# Altium PCB Motor Control.PcbDoc
Units mil, origin at the board's own origin, x right, y up, seen from the top; angles counter-clockwise.
Board outline 5000 x 2300 mil, 2 copper layers (Top Layer, Bottom Layer); 27 components, 75 nets, 236 pads, 0 vias.
Unrouted connection lines stored in the file: 130.
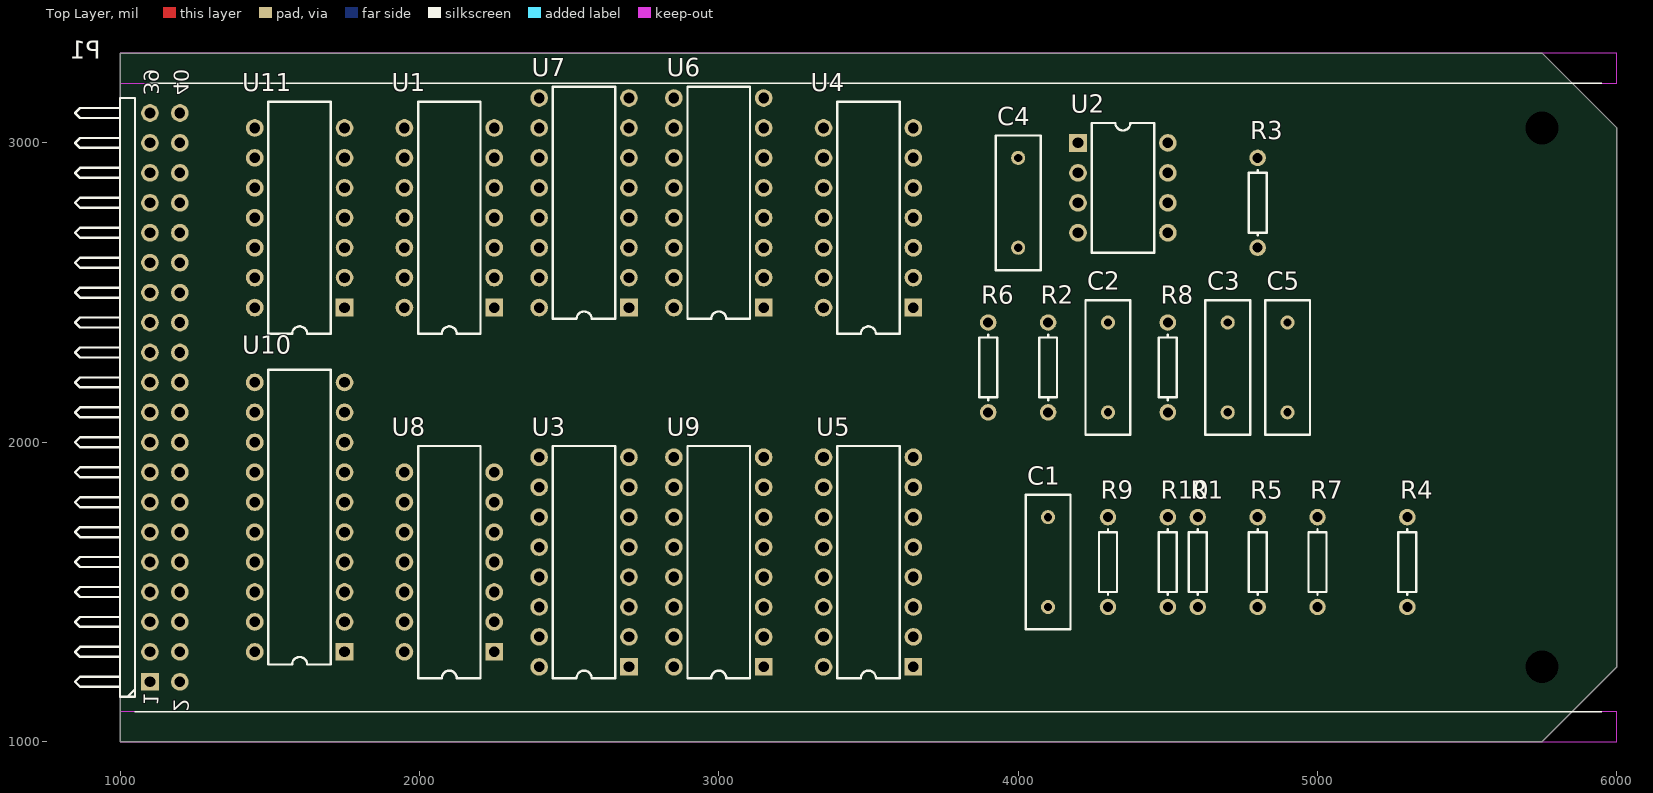
[diagram p0: Top Layer view]
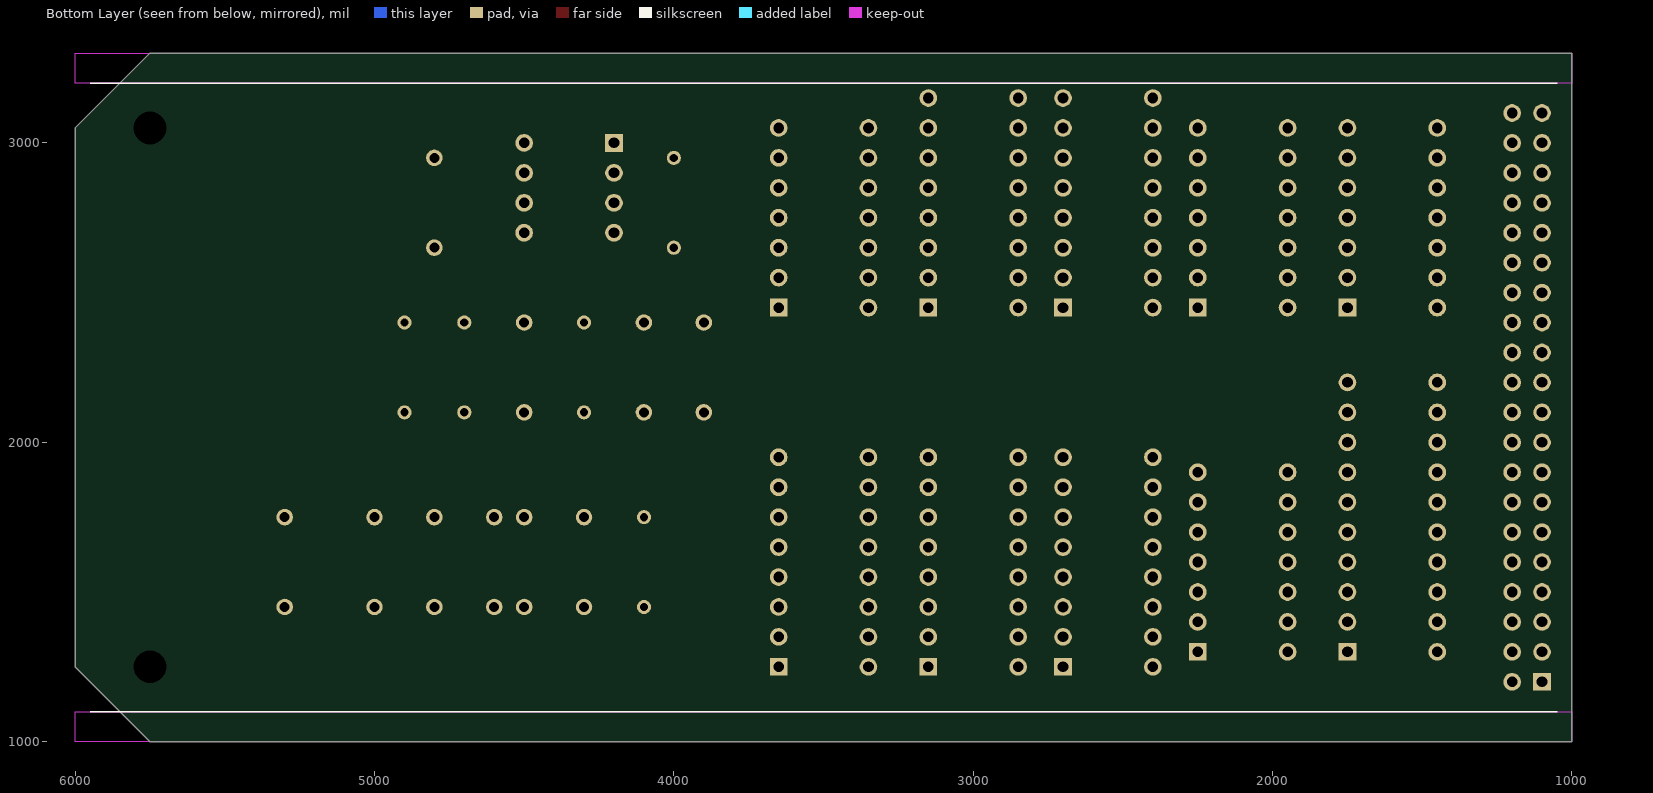
[diagram p1: Bottom Layer view, seen from below]

## Layer stack, top to bottom
Top Solder: solder mask 0.4, Solder Resist, Dk 3.5
Top Layer: signal copper 1.4
Dielectric 1: dielectric 12.6, FR-4, Dk 4.8
Bottom Layer: signal copper 1.4
Bottom Solder: solder mask 0.4, Solder Resist, Dk 3.5

## Board outline
6000,1250 5750,1000 1000,1000 1000,3300 5750,3300 6000,3050

## Design rules (kind name [scope] priority, off if disabled: settings)
Clearance [All] p1: gap=10 ignorepadtopadclearanceinfootprint=FALSE except(0: Arc-Hole Track-Hole SMDPad-Hole THPad-Hole Via-Hole Fill-Hole Poly-Hole Region-Hole Text-Hole)
PolygonConnect [All] p1: connectstyle=Relief reliefconductorwidth=10 reliefentries=4 polygonreliefangle="90 Angle" airgapwidth=10
RoutingVias [All] p1: holewidth=28 width=50 viastyle="Through Hole" minholewidth=28 minwidth=50 maxholewidth=28 maxwidth=50
SolderMaskExpansion [All] p1: expansion=4 istentingtop=FALSE
Width [All] p1: maxlimit=10 minlimit=10 preferedwidth=10
30 further rules are at their usual default settings.

## Classes and differential pairs
net class CNT_[7..0]: CNT_0 CNT_1 CNT_2 CNT_3 CNT_4 CNT_5 CNT_6 CNT_7
component class ZF: U8 U11
component class Register: P1 U9 U10
net class N000-1_[8..0]: BUS_0 BUS_1 BUS_2 BUS_3 BUS_4 BUS_5 BUS_6 BUS_7 BUS_[15..0]
component class Encoder: C1 C2 C3 C4 C5 R1 R2 R3 R4 R5 R6 R7 R8 R9 R10 U1 U2 U3 U4 U5 U6 U7

## Components (designator, comment, footprint, x,y, rotation, side; value= is the part's Value field where it differs from the comment)
C1 "Cap" RAD-0.3 4100,1600 r90 top value=100nF
C2 "Cap" RAD-0.3 4300,2250 r270 top value=100nF
C3 "Cap" RAD-0.3 4700,2250 r270 top value=100nF
C4 "Cap" RAD-0.3 4000,2800 r270 top value=100pF
C5 "Cap" RAD-0.3 4900,2250 r90 top value=100pF
P1 "Header 20X2H" HDR2X20H 1100,1200 r90 top
R1 "Res1" AXIAL-0.3 4600,1600 r90 top value=100
R2 "Res1" AXIAL-0.3 4100,2250 r270 top value=100
R3 "Res1" AXIAL-0.3 4800,2800 r270 top value=10k
R4 "Res1" AXIAL-0.3 5300,1600 r90 top value=10k
R5 "Res1" AXIAL-0.3 4800,1600 r90 top value=10k
R6 "Res1" AXIAL-0.3 3900,2250 r90 top value=10k
R7 "Res1" AXIAL-0.3 5000,1600 r90 top value=25k
R8 "Res1" AXIAL-0.3 4500,2250 r270 top value=25k
R9 "Res1" AXIAL-0.3 4300,1600 r90 top value=1k
R10 "Res1" AXIAL-0.3 4500,1600 r90 top value=1k
U1 "SN74LS04N" N014 2100,2750 r90 top
U2 "LM393P" P008 4350,2850 r270 top
U3 "SN74LS174N" N016 2550,1600 r90 top
U4 "SN74LS86AN" N014 3500,2750 r90 top
U5 "SN74LS169BN" N016 3500,1600 r90 top
U6 "SN74LS169BN" N016 3000,2800 r90 top
U7 "SN74LS169BN" N016 2550,2800 r90 top
U8 "SN74LS32N" N014 2100,1600 r90 top
U9 "SN74LS173AN" N016D 3000,1600 r90 top
U10 "SN74LS245N" N020 1600,1750 r90 top
U11 "SN74LS32N" N014 1600,2750 r90 top

## Footprints (in the part's own frame and the unit in brackets; to place one, negate y for a bottom-side part, rotate by r counter-clockwise, add the part's x,y. Pads: shape width x height; smd on the part's side, far side on the other; paste and mask are expansions set on the pad)
AXIAL-0.3 [mm] "Axial Device, Thru-Hole; 2 Leads; 0.3 in Pin Spacing"
  round 1.4 hole 0.85: 1(-3.81,0) 2(3.81,0)
  silkscreen extent -2.77,-0.76 2.77,0.76
HDR2X20H [mm] "Connector; Header; 20x2 Position; Right Angle"
  rect 1.5x1.5 hole 0.9: 1(0,0)
  round 1.5 hole 0.9: 2(0,-2.54) 3(2.54,0) 4(2.54,-2.54) 5(5.08,0) 6(5.08,-2.54) 7(7.62,0) 8(7.62,-2.54) 9(10.16,0) 10(10.16,-2.54) 11(12.7,0) 12(12.7,-2.54) 13(15.24,0) 14(15.24,-2.54) 15(17.78,0) 16(17.78,-2.54) 17(20.32,0) 18(20.32,-2.54) 19(22.86,0) 20(22.86,-2.54) 21(25.4,0) 22(25.4,-2.54) 23(27.94,0) 24(27.94,-2.54) 25(30.48,0) 26(30.48,-2.54) 27(33.02,0) 28(33.02,-2.54) 29(35.56,0) 30(35.56,-2.54) 31(38.1,0) 32(38.1,-2.54) 33(40.64,0) 34(40.64,-2.54) 35(43.18,0) 36(43.18,-2.54) 37(45.72,0) 38(45.72,-2.54) 39(48.26,0) 40(48.26,-2.54)
  silkscreen extent -1.27,1.27 49.53,6.35
N014 [mm] "DIP; 14 Leads; Row Spacing 7.62 mm; Pitch 2.54 mm"
  rect 1.5x1.5 hole 0.9: 1(-7.62,-3.81)
  round 1.5 hole 0.9: 2(-5.08,-3.81) 3(-2.54,-3.81) 4(0,-3.81) 5(2.54,-3.81) 6(5.08,-3.81) 7(7.62,-3.81) 8(7.62,3.81) 9(5.08,3.81) 10(2.54,3.81) 11(0,3.81) 12(-2.54,3.81) 13(-5.08,3.81) 14(-7.62,3.81)
  silkscreen extent -9.85,-2.65 9.85,2.65, body extent -9.15,-5.08 9.15,5.12, height 7.88
N016 [mm] "DIP; 16 Leads; Row Spacing 7.62 mm; Pitch 2.54 mm"
  rect 1.5x1.5 hole 0.9: 1(-8.89,-3.81)
  round 1.5 hole 0.9: 2(-6.35,-3.81) 3(-3.81,-3.81) 4(-1.27,-3.81) 5(1.27,-3.81) 6(3.81,-3.81) 7(6.35,-3.81) 8(8.89,-3.81) 9(8.89,3.81) 10(6.35,3.81) 11(3.81,3.81) 12(1.27,3.81) 13(-1.27,3.81) 14(-3.81,3.81) 15(-6.35,3.81) 16(-8.89,3.81)
  silkscreen extent -9.85,-2.65 9.85,2.65
N016D [mm] "DIP; 16 Leads; Row Spacing 7.62 mm; Pitch 2.54 mm"
  rect 1.5x1.5 hole 0.9: 1(-8.89,-3.81)
  round 1.5 hole 0.9: 2(-6.35,-3.81) 3(-3.81,-3.81) 4(-1.27,-3.81) 5(1.27,-3.81) 6(3.81,-3.81) 7(6.35,-3.81) 8(8.89,-3.81) 9(8.89,3.81) 10(6.35,3.81) 11(3.81,3.81) 12(1.27,3.81) 13(-1.27,3.81) 14(-3.81,3.81) 15(-6.35,3.81) 16(-8.89,3.81)
  silkscreen extent -9.85,-2.65 9.85,2.65
N020 [mm] "DIP; 20 Leads; Row Spacing 7.62 mm; Pitch 2.54 mm"
  rect 1.5x1.5 hole 0.9: 1(-11.43,-3.81)
  round 1.5 hole 0.9: 2(-8.89,-3.81) 3(-6.35,-3.81) 4(-3.81,-3.81) 5(-1.27,-3.81) 6(1.27,-3.81) 7(3.81,-3.81) 8(6.35,-3.81) 9(8.89,-3.81) 10(11.43,-3.81) 11(11.43,3.81) 12(8.89,3.81) 13(6.35,3.81) 14(3.81,3.81) 15(1.27,3.81) 16(-1.27,3.81) 17(-3.81,3.81) 18(-6.35,3.81) 19(-8.89,3.81) 20(-11.43,3.81)
  silkscreen extent -12.5,-2.65 12.5,2.65, body extent -13.08,-5.08 13.08,5.12, height 7.88
P008 [mm] "DIP; 8 Leads; Row Spacing 7.62 mm; Pitch 2.54 mm"
  rect 1.5x1.5 hole 0.9: 1(-3.81,-3.81)
  round 1.5 hole 0.9: 2(-1.27,-3.81) 3(1.27,-3.81) 4(3.81,-3.81) 5(3.81,3.81) 6(1.27,3.81) 7(-1.27,3.81) 8(-3.81,3.81)
  silkscreen extent -5.5,-2.65 5.5,2.65
RAD-0.3 [mm] "Radial Cap, Thru-Hole; 2 Leads; 0.3 in Pin Spacing"
  round 1.2 hole 0.7: 1(-3.81,0) 2(3.81,0)
  silkscreen extent -5.71,-1.91 5.71,1.91

## Part data
C1 C2 C3 C4 C5: "Capacitor", LatestRevisionDate=17-Jul-2002, LatestRevisionNote="Re-released for DXP Platform.", PackageDescription="Radial Cap, Thru-Hole; 2 Leads; 0.3 in Pin Spacing", PackageReference=RAD-0.3, Published=8-Jun-2000, Publisher="Altium Limited"
P1: library part "Header 20x2H", "Header, 20-Pin, Dual row, Right Angle", LatestRevisionDate=17-Jul-2002, LatestRevisionNote="Re-released for DXP Platform.", Publisher="Altium Limited"
R1 R2 R3 R4 R5 R6 R7 R8 R9 R10: "Resistor", LatestRevisionDate=17-Jul-2002, LatestRevisionNote="Re-released for DXP Platform.", PackageDescription="Axial Device, Thru-Hole; 2 Leads; 0.3 in Pin Spacing", PackageReference=AXIAL-0.3, Published=8-Jun-2000, Publisher="Altium Limited"
U1: "Hex Inverter", ComponentLink1Description="Manufacturer Link", ComponentLink1URL=http://www.ti.com/, ComponentLink2Description=Datasheet, ComponentLink2URL=http://www-s.ti.com/sc/ds/sn74ls04.pdf, DatasheetVersion=Mar-1988, LatestRevisionDate=04-Mar-2005, LatestRevisionNote="Stylized 3D Model Added.", PackageDescription="DIP; 14 Leads; Row Spacing 7.62 mm; Pitch 2.54 mm", PackageReference=N014, PackageVersion=Oct-1995, Published=8-Jun-2000, Publisher="Altium Limited"
U2: "Dual Differential Comparator", Code_JEDEC=MO-001-AN, ComponentLink1Description="Manufacturer Link", ComponentLink1URL=http://www.ti.com/, ComponentLink2Description=Datasheet, ComponentLink2URL=http://www-s.ti.com/sc/ds/lm193.pdf, DatasheetVersion=Nov-1988, LatestRevisionDate=04-Mar-2005, LatestRevisionNote="Stylized 3D Model Added.", PackageDescription="DIP; 8 Leads; Row Spacing 7.62 mm; Pitch 2.54 mm", PackageReference=P008, PackageVersion=Jun-1999, Published=15-Apr-2002, Publisher="Altium Limited"
U3: "Hex D-Type Flip-Flop with Clear", Code_JEDEC=MS-001-BB, ComponentLink1Description="Manufacturer Link", ComponentLink1URL=http://www.ti.com/, ComponentLink2Description=Datasheet, ComponentLink2URL=http://www-s.ti.com/sc/ds/sn74175.pdf, DatasheetVersion=Mar-1988, LatestRevisionDate=04-Mar-2005, LatestRevisionNote="Stylized 3D Model Added.", PackageDescription="DIP; 16 Leads; Row Spacing 7.62 mm; Pitch 2.54 mm", PackageReference=N016, PackageVersion=Oct-1995, Published=8-Jun-2000, Publisher="Altium Limited"
U4: "Quadruple 2-Input Exclusive-OR Gate", ComponentLink1Description="Manufacturer Link", ComponentLink1URL=http://www.ti.com/, ComponentLink2Description=Datasheet, ComponentLink2URL=http://www-s.ti.com/sc/ds/sn74ls86a.pdf, DatasheetVersion=Mar-1988, LatestRevisionDate=04-Mar-2005, LatestRevisionNote="Stylized 3D Model Added.", PackageDescription="DIP; 14 Leads; Row Spacing 7.62 mm; Pitch 2.54 mm", PackageReference=N014, PackageVersion=Oct-1995, Published=8-Jun-2000, Publisher="Altium Limited"
U5 U6 U7: "Synchronous 4-Bit Up/Down Binary Counter", Code_JEDEC=MS-001-BB, ComponentLink1Description="Manufacturer Link", ComponentLink1URL=http://www.ti.com/, ComponentLink2Description=Datasheet, ComponentLink2URL=http://www-s.ti.com/sc/ds/sn74ls169b.pdf, DatasheetVersion=Mar-1988, LatestRevisionDate=04-Mar-2005, LatestRevisionNote="Stylized 3D Model Added.", PackageDescription="DIP; 16 Leads; Row Spacing 7.62 mm; Pitch 2.54 mm", PackageReference=N016, PackageVersion=Oct-1995, Published=8-Jun-2000, Publisher="Altium Limited"
U8 U11: "Quadruple 2-Input Positive-OR Gate", ComponentLink1Description="Manufacturer Link", ComponentLink1URL=http://www.ti.com/, ComponentLink2Description=Datasheet, ComponentLink2URL=http://www-s.ti.com/sc/ds/sn74ls32.pdf, DatasheetVersion=Mar-1988, LatestRevisionDate=04-Mar-2005, LatestRevisionNote="Stylized 3D Model Added.", PackageDescription="DIP; 14 Leads; Row Spacing 7.62 mm; Pitch 2.54 mm", PackageReference=N014, PackageVersion=Oct-1995, Published=8-Jun-2000, Publisher="Altium Limited"
U9: "4-Bit D-Type Register with 3-State Outputs", Code_JEDEC=MS-001-BB, ComponentLink1Description="Manufacturer Link", ComponentLink1URL=http://www.ti.com/, ComponentLink2Description=Datasheet, ComponentLink2URL=http://www-s.ti.com/sc/ds/sn74ls173a.pdf, DatasheetVersion=Mar-1988, LatestRevisionDate=04-Mar-2005, LatestRevisionNote="Stylized 3D Model Added.", PackageDescription="DIP; 16 Leads; Row Spacing 7.62 mm; Pitch 2.54 mm", PackageReference=N016D, PackageVersion=Oct-1995, Published=8-Jun-2000, Publisher="Altium Limited"
U10: "Octal Bus Transceiver with 3-State Outputs", ComponentLink1Description="Manufacturer Link", ComponentLink1URL=http://www.ti.com/, ComponentLink2Description=Datasheet, ComponentLink2URL=http://www-s.ti.com/sc/ds/sn74ls245.pdf, DatasheetVersion=Mar-1988, LatestRevisionDate=04-Mar-2005, LatestRevisionNote="Stylized 3D Model Added.", PackageDescription="DIP; 20 Leads; Row Spacing 7.62 mm; Pitch 2.54 mm", PackageReference=N020, PackageVersion=Oct-1995, Published=8-Jun-2000, Publisher="Altium Limited"

## Free pads (board coordinates)
  round 0 hole 109: ""(5750,1250) ""(5750,3050)

## Nets (pads, with @x,y where several pads share a name; then routed paths per layer and width w, separated by ;. In a path a pad name is that pad's centre, name@x,y a point inside that pad or via, vN(x,y) a via of type N, cw(c..) or ccw(c..) an arc to the next point about the centre after c; other vN are vias at no path point)
A_FILT: C4.1 R7.1 R9.2 U2.1 U3.3
ADDR_0: P1.6
ADDR_1: P1.8
ADDR_2: P1.10
ADDR_3: P1.12
ADDR_4: P1.14
ADDR_5: P1.16
ADDR_6: P1.18
ADDR_7: P1.20
ADDR_8: P1.22
ADDR_9: P1.24
ADDR_10: P1.26
ADDR_11: P1.28
ADDR_12: P1.30
ADDR_13: P1.32
ADDR_14: P1.34
ADDR_15: P1.36
ADDR_16: P1.38
ADDR_17: P1.40
B_FILT: C5.1 R8.1 R10.2 U2.7 U3.14
BUS_0: P1.5 U9.14 U10.18
BUS_1: P1.7 U9.13 U10.17
BUS_2: P1.9 U9.12 U10.16
BUS_3: P1.11 U9.11 U10.15
BUS_4: P1.13 U10.14
BUS_5: P1.15 U10.13
BUS_6: P1.17 U10.12
BUS_7: P1.19 U10.11
CLK: P1.37 U3.9 U5.2 U6.2 U7.2 U9.7
CNT_0: U6.14 U8.1 U10.2
CNT_1: U6.13 U8.2 U10.3
CNT_2: U6.12 U8.4 U10.4
CNT_3: U6.11 U8.5 U10.5
CNT_4: U7.14 U8.9 U10.6
CNT_5: U7.13 U8.10 U10.7
CNT_6: U7.12 U10.8 U11.12
CNT_7: U7.11 U10.9 U11.13
Count: U1.4 U5.10
Direction: U4.3 U5.1 U6.1 U7.1
EN: P1.39
EN_MOT: U9.3
GND: C1.2 C2.2 C3.2 P1.3 P1.4 R4.2 U1.7 U2.4 U3.8 U4.7 U5.3 U5.4 U5.5 U5.7 U5.8 U6.7 U6.8 U7.7 U7.8 U8.7 U9.1 U9.2 U9.8 U10.10 U11.7
L\O\A\D\: U5.9 U6.9 U7.9
L\O\A\D\_\C\T\R\L\: U9.9 U9.10
LOAD: P1.33
NetC1_1: C1.1 R1.1 R5.2
NetC2_1: C2.1 R2.1 R6.2
NetC4_2: C4.2 R5.1 R7.2 U2.3
NetC5_2: C5.2 R6.1 R8.2 U2.5
NetU1_3: U1.3 U4.11
NetU1_5: U1.5 U11.8
NetU3_2: U3.2 U3.4
NetU3_13: U3.13 U3.15
NetU4_6: U4.6 U4.12
NetU4_8: U4.8 U4.13
NetU5_15: U5.15 U6.10
NetU6_15: U6.15 U7.10
NetU8_3: U8.3 U11.1
NetU8_6: U8.6 U11.2
NetU8_8: U8.8 U11.4
NetU8_11: U8.11 U9.15
NetU11_3: U11.3 U11.9
NetU11_5: U11.5 U11.11
NetU11_6: U11.6 U11.10
O\U\T\: P1.31
QUAD_A: U3.5 U3.6 U4.2 U4.4
QUAD_A_DELAY: U3.7 U4.5
QUAD_B: U3.11 U3.12 U4.10
QUAD_B_DELAY: U3.10 U4.1 U4.9
R\S\T\: U1.2 U3.1
REV_MOT: U9.4
RST: P1.35 U1.1 U8.12
VCC: P1.1 P1.2 R3.1 R9.1 R10.1 U1.14 U2.8 U3.16 U4.14 U5.6 U5.16 U6.16 U7.16 U8.14 U9.16 U10.1 U10.20 U11.14
VCC/2_REF: C3.1 R3.2 R4.1 U2.2 U2.6
ZERO: U1.6 U8.13
pads on no net: P1.21 P1.23 P1.25 P1.27 P1.29 R1.2 R2.2 U1.8 U1.9 U1.10 U1.11 U1.12 U1.13 U5.11 U5.12 U5.13 U5.14 U6.3 U6.4 U6.5 U6.6 U7.3 U7.4 U7.5 U7.6 U7.15 U9.5 U9.6 U10.19

## Keep-outs
Top Layer:
  rectangle: 1000,1000 6000,1100
  rectangle: 1000,3200 6000,3300
Bottom Layer:
  rectangle: 1000,1000 6000,1100
  rectangle: 1000,3200 6000,3300

## Silkscreen, mask and mechanical layers (free items; w line width, h text height)
Top Overlay:
  lines w5: 1050,1100 5950,1100 ; 1100,3200 5950,3200
Bottom Overlay:
  lines w5: 1050,1100 5950,1100 ; 1050,3200 5950,3200

## Text inside footprints (layer, text, board x,y; h text height)
P1: Top Overlay "2" at 1180,1100 h50 r270; Top Overlay "1" at 1080,1120 h50 r270; Top Overlay "39" at 1080,3160 h50 r270; Top Overlay "40" at 1180,3160 h50 r270